# Altium PCB EK2_SMPS.PcbDoc
Units mm, origin at the board's own origin, x right, y up, seen from the top; angles counter-clockwise.
Board outline 100 x 100 mm, 2 copper layers (Top Layer, Bottom Layer); 55 components, 21 nets, 150 pads, 77 vias.
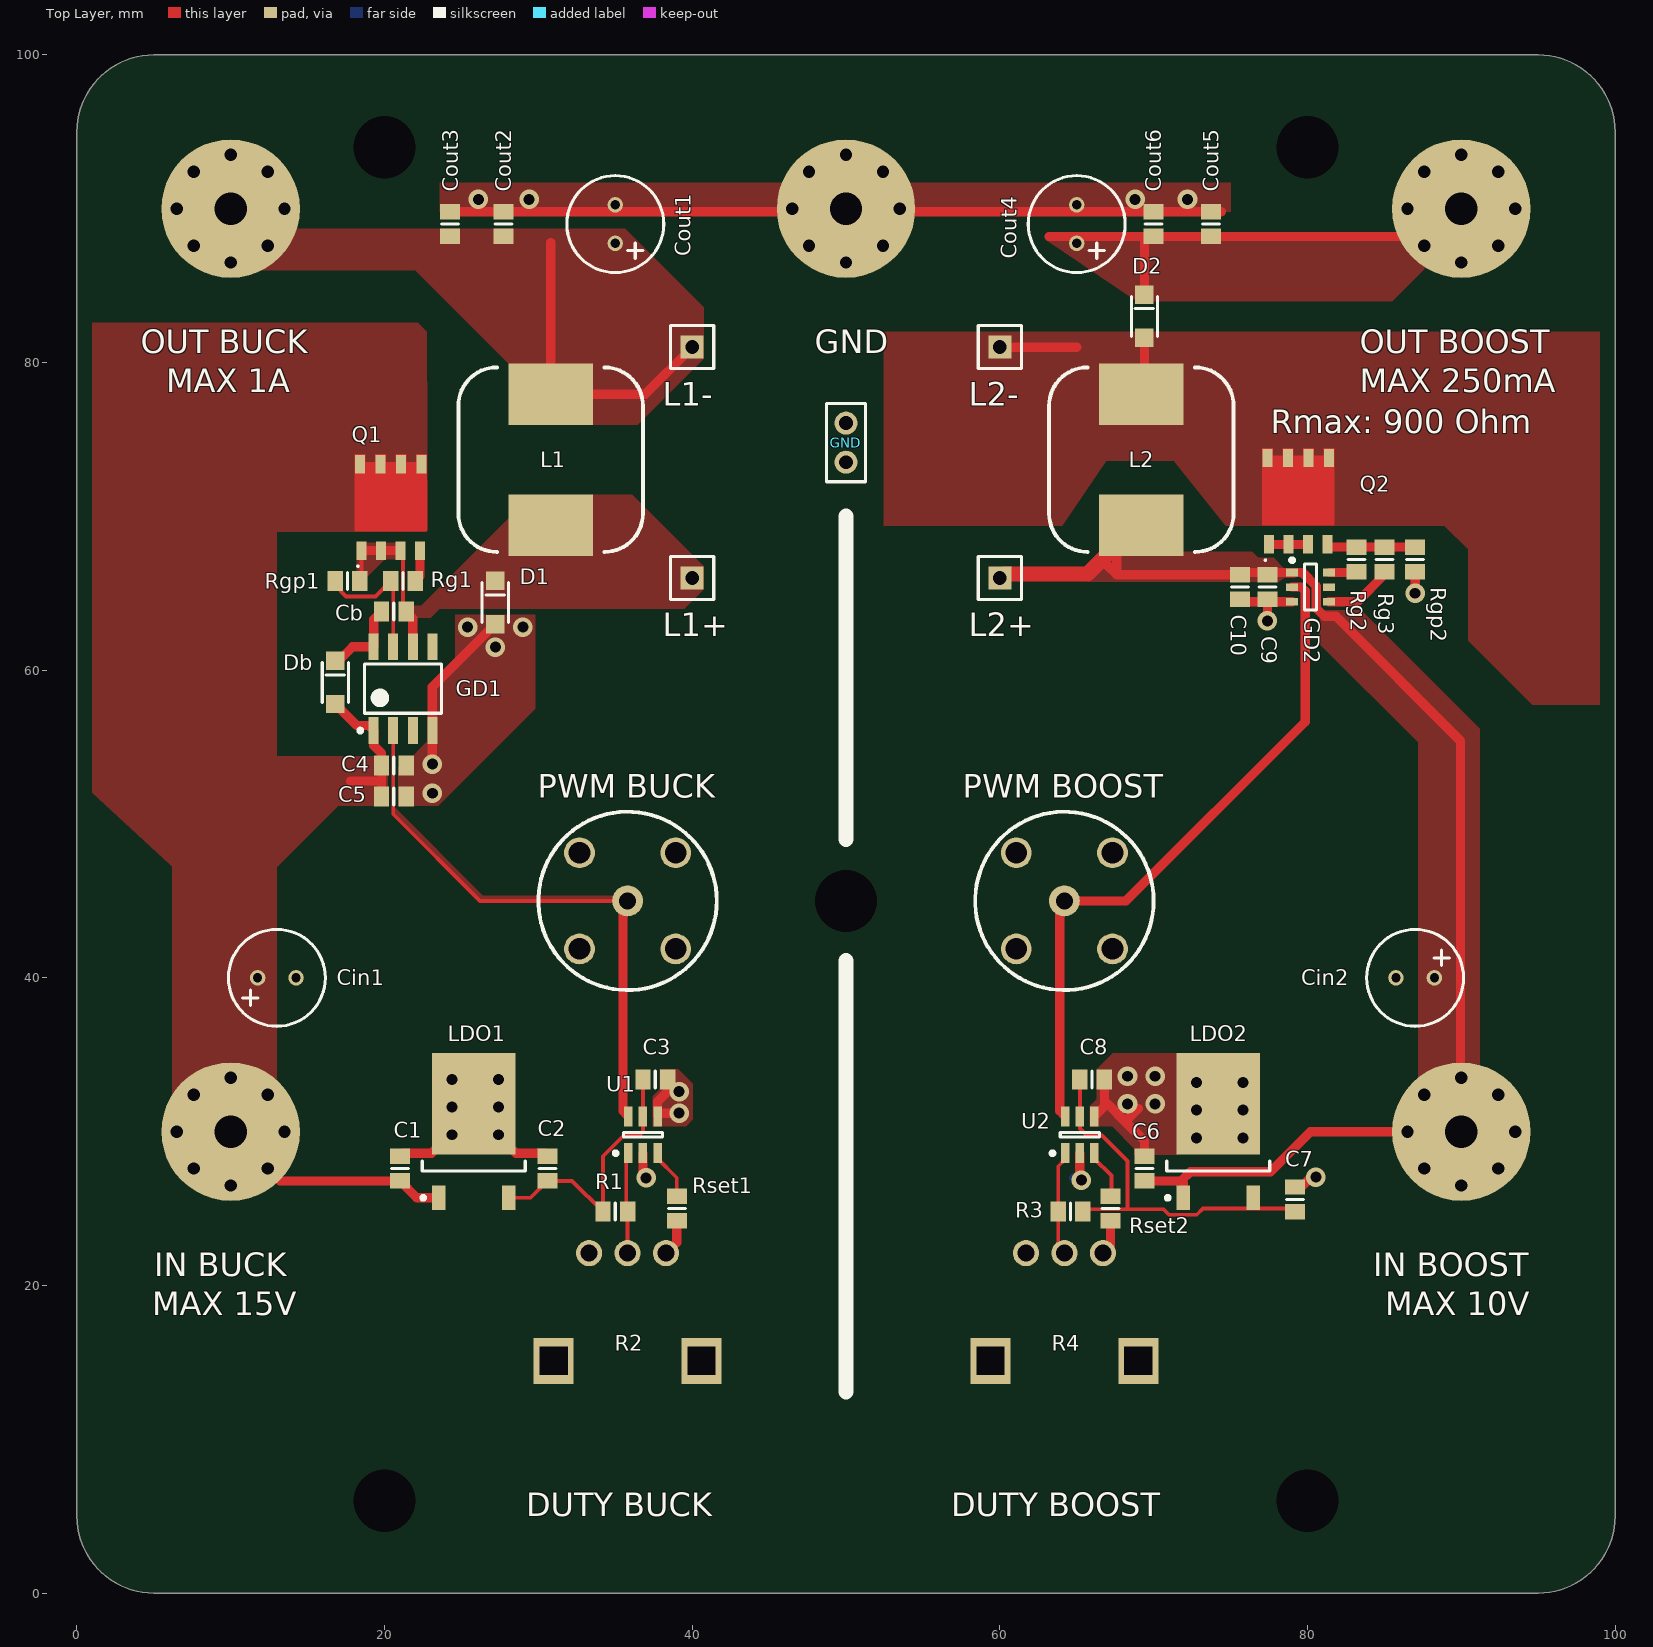
[diagram p0: Top Layer view]
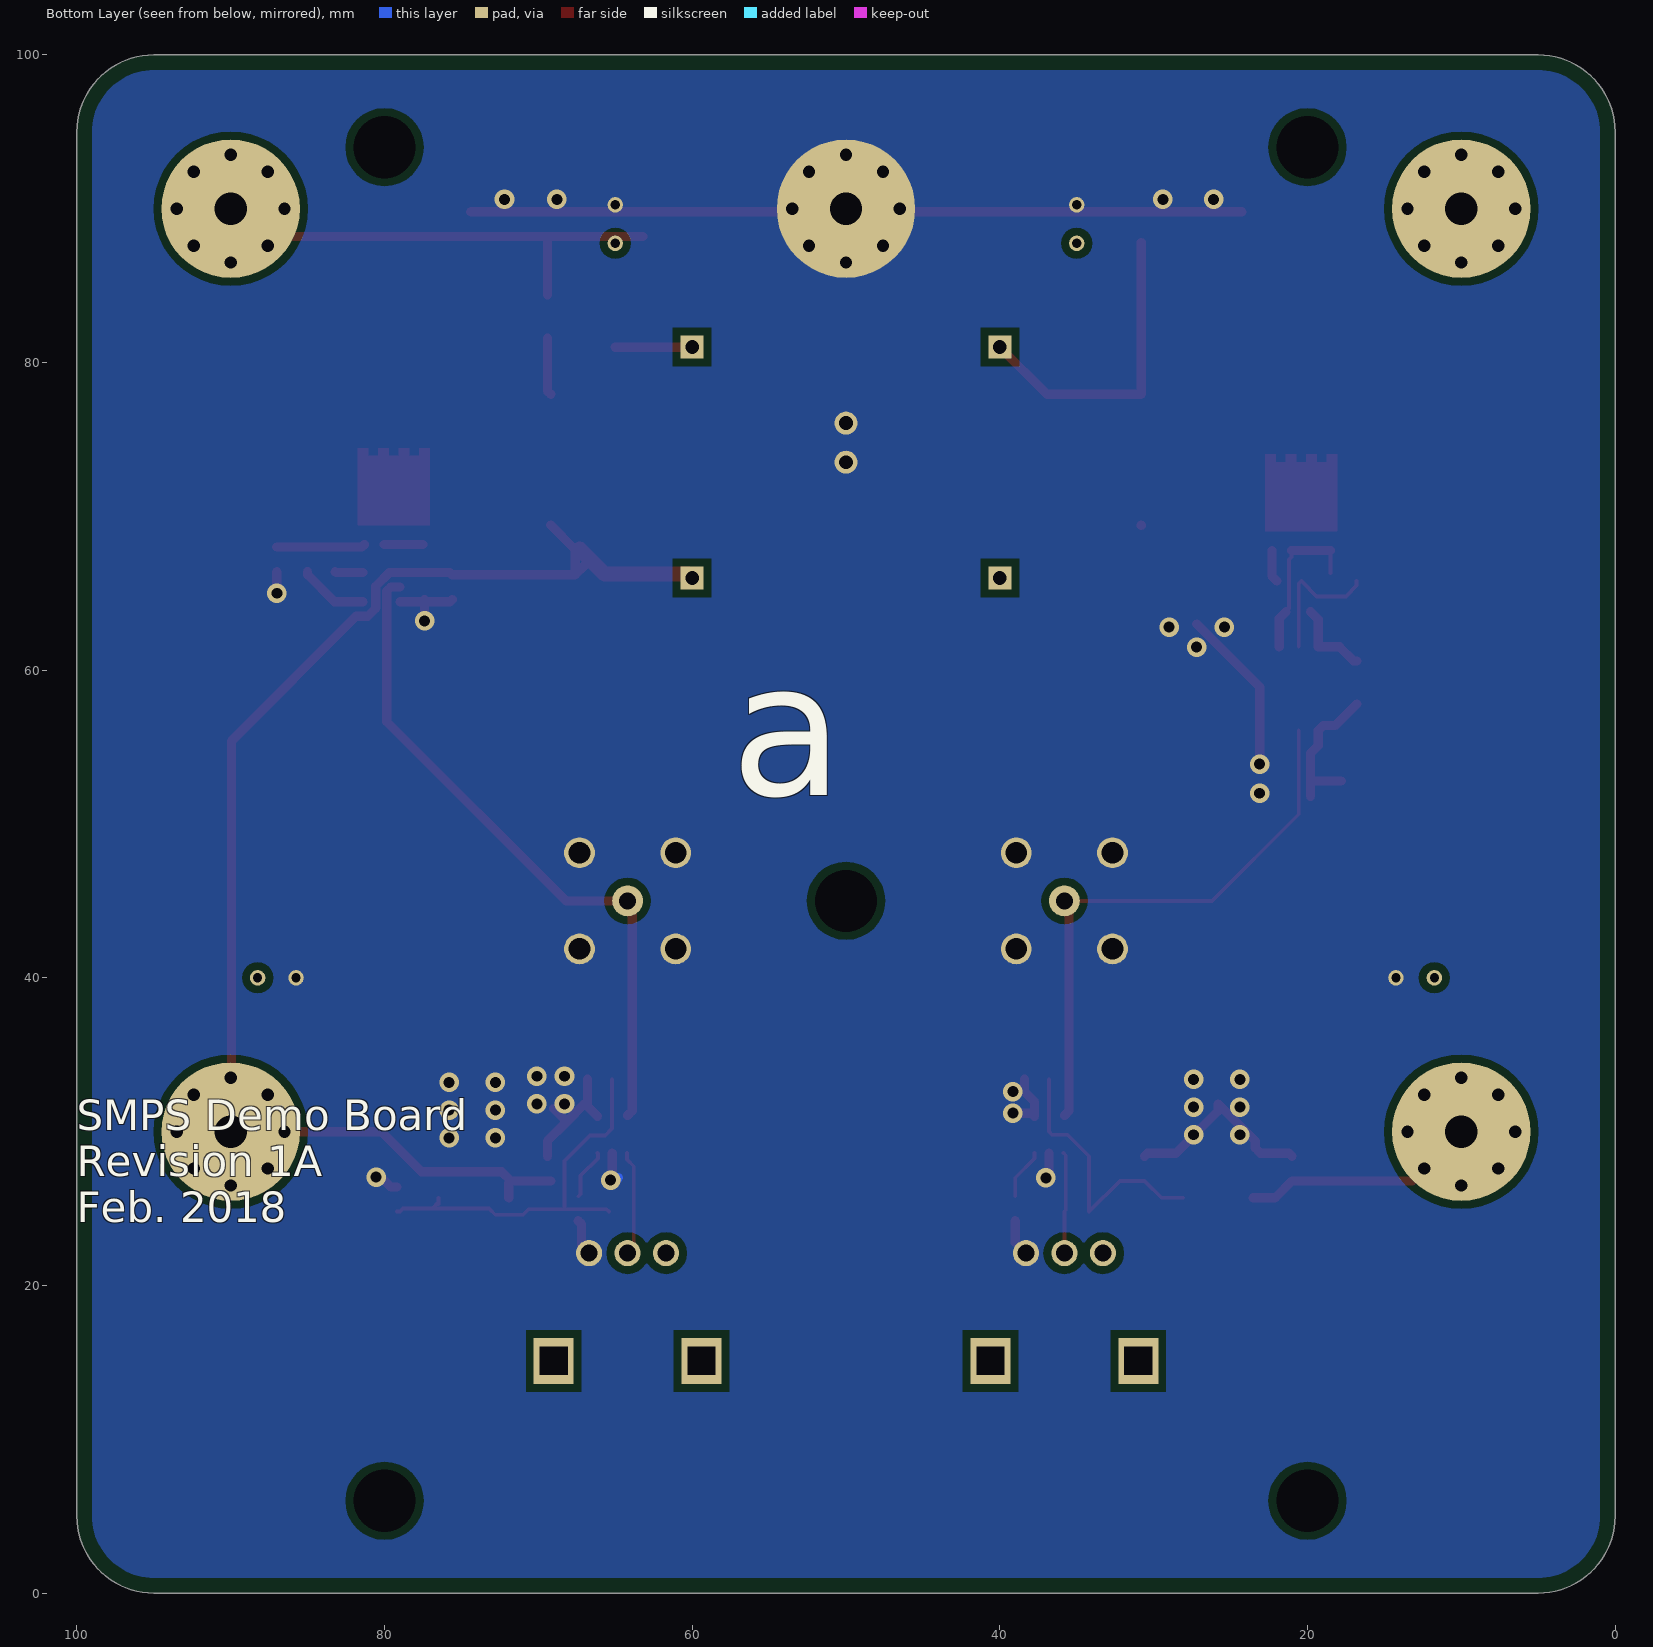
[diagram p1: Bottom Layer view, seen from below]

## Layer stack, top to bottom
Top Solder: solder mask 0.0102, Solder Resist, Dk 3.5
Top Layer: signal copper 0.0356
Dielectric 1: dielectric 0.32, FR-4, Dk 4.8
Bottom Layer: signal copper 0.0356
Bottom Solder: solder mask 0.0102, Solder Resist, Dk 3.5

## Board outline
5,0 cw(c5,5) 0,5 0,95 cw(c5,95) 5,100 95,100 cw(c95,95) 100,95 100,5 cw(c95,5) 95,0

## Design rules (kind name [scope] priority, off if disabled: settings)
Clearance Clearance_GND_plane [InNet('GND') And OnLayer('Bottom Layer')] p1: gap=0.5 ignorepadtopadclearanceinfootprint=TRUE
Clearance Clearance_1 [All] p2: gap=0.125 ignorepadtopadclearanceinfootprint=TRUE
HoleSize [All] p1: absolutevalues=TRUE maxlimit=5 minlimit=0.025 maxpercent=80.000 minpercent=20.000
HoleToHoleClearance HoleToHoleClearance_1 [InNet('GND') OR InNet('NetC1_1') OR InNet('NetC6_2') OR InNet('NetCout1_2') OR InNet('NetCout5_2')] p1: gap=0 allowstackedmicrovias=TRUE
HoleToHoleClearance [All] p2: gap=0.125 allowstackedmicrovias=TRUE
MinimumSolderMaskSliver [All] p1: minsoldermaskwidth=0.125
NetAntennae [All] p1 off: netantennaetolerance=0
PolygonConnect [All] p1: connectstyle=Direct reliefconductorwidth=0.254 reliefentries=4 polygonreliefangle="90 Angle" airgapwidth=0.254
RoutingVias [All] p1: holewidth=0.711 width=1.27 viastyle="Through Hole" minholewidth=0.3 minwidth=0.4 maxholewidth=5 maxwidth=5
SMDNeckDown [All] p1 off: percent=50.000
SilkToSilkClearance [All] p1: silktosilkclearance=0.125
SilkToSolderMaskClearance [IsPad] p1: minsilkscreentomaskgap=0.125 clearancetoexposedcopper=TRUE
SolderMaskExpansion [All] p1: expansion=0.102
UnRoutedNet [All] p1 off:
Width [InNet('NetC1_1') OR InNet('NetC6_2') OR InNet('GND') OR InNet('NetD2_1') OR InNet('NetCout5_2') OR InNet('NetGD2_6') OR InNet('NetQ2_4') OR InNet('NetGD2_2') OR InNet('NetCb_1') OR  InNet('NetQ1_4') OR InNet('NetQ2_4')OR InNet('NetCout1_2') OR InNet('NetCb_2')  OR InNet('NetGD2_4')] p1: maxlimit=1 minlimit=0.254 preferedwidth=0.6
Width Width_1 [All] p2: maxlimit=1 minlimit=0.254 preferedwidth=0.254
23 further rules are at their usual default settings.

## Components (designator, comment, footprint, x,y, rotation, side; value= is the part's Value field where it differs from the comment)
C1 "Cap" 6-0805_L 21,27.6 r90 top value=100nF
C2 "Cap" 6-0805_L 30.6,27.6 r270 top value=100nF
C3 "Cap" 6-0805_L 37.6,33.4 r180 top value=100nF
C4 "Cap" 6-0805_L 20.6,53.8 r180 top value=100nF
C5 "Cap" 6-0805_L 20.6,51.8 r180 top value=1uF
C6 "Cap" 6-0805_L 69.4,27.6 r270 top value=100nF
C7 "Cap" 6-0805_L 79.2,25.6 r270 top value=100nF
C8 "Cap" 6-0805_L 66,33.4 r0 top value=100nF
C9 "Cap" 6-0805_L 77.4,65.4 r270 top value=100nF
C10 "Cap" 6-0805_L 75.6,65.4 r270 top value=1uF
Cb "Cap" 6-0805_L 20.6,63.8 r0 top value=100nF
Cin1 "56uF" PANASONIC56 13,40 r180 top
Cin2 "56uF" PANASONIC56 87,40 r0 top
Cout1 "56uF" PANASONIC56 35,89 r270 top
Cout2 "Cap" 6-0805_L 27.733,89 r270 top value=1uF
Cout3 "Cap" 6-0805_L 24.266,89 r270 top value=100nF
Cout4 "56uF" PANASONIC56 65,89 r270 top
Cout5 "Cap" 6-0805_L 73.733,89 r270 top value=1uF
Cout6 "Cap" 6-0805_L 70,89 r270 top value=100nF
D1 "PMEG6020" PMEG6020 27.2,64.4 r270 top
D2 "PMEG6020" PMEG6020 69.4,83 r270 top
Db "PMEG6020" PMEG6020 16.8,59.2 r270 top
GD1 "FAN7371" FAN7371 21.2,58.8 r90 top
GD2 "ZXGD3005E6" "ZXGD3005E6 (DIODES INC)" 80.2,65.4 r0 top
GND "Banana Jack Black" "CT2912-0 (BLACK)" 50,90 r0 top locked
GND "Header 2" PIN2 50,74.79 r270 top
"IN BOOST" "MAX 10V" "CT2912-2 (RED)" 90,30 r0 top locked
"IN BUCK" "MAX 15V" "CT2912-2 (RED)" 10,30 r0 top locked
L1 "Coilcraft MSS1246-154KL" "COILCRAFT MSS1246-154KL" 30.8,73.685 r180 top value=150uH
L1+ "Plug" PIN1 40,66 r0 top
L1- "Plug" PIN1 40,81 r0 top
L2 "Coilcraft MSS1246-154KL" "COILCRAFT MSS1246-154KL" 69.2,73.685 r180 top value=150uH
L2+ "Plug" PIN1 60,66 r0 top
L2- "Plug" PIN1 60,81 r0 top
LDO1 "LP2950CDT-5.0" TD03B_L 25.8,30 r90 top
LDO2 "LP2950CDT-5.0" TD03B_L 74.2,30 r90 top
"OUT BOOST" "MAX 250mA" "CT2912-2 (RED)" 90,90 r0 top locked
"OUT BUCK" "MAX 1A" "CT2912-2 (RED)" 10,90 r0 top locked
"PWM BOOST" "BNC" BNC 64.2,45 r0 top locked
"PWM BUCK" "BNC" BNC 35.8,45 r0 top locked
Q1 "BSC900N20NS3 G" INF-PG-TDSON-8-1_V 20.4,70.6 r0 top
Q2 "BSC900N20NS3 G" INF-PG-TDSON-8-1_V 79.4,71 r0 top
R1 "Res1" 6-0805_L 35,24.8 r0 top value=100K
R2 "DUTY BUCK" "BOURNS PTV09A-4020" 35.8,15 r180 top locked value=20K
R3 "Res1" 6-0805_L 64.6,24.8 r0 top value=150K
R4 "DUTY BOOST" "BOURNS PTV09A-4020" 64.2,15 r180 top locked value=20K
Rg1 "Res1" 6-0805_L 21.2,65.8 r0 top value=5R
Rg2 "Res1" 6-0805_L 83.2,67.2 r90 top value=5R
Rg3 "Res1" 6-0805_L 85,67.2 r90 top value=5R
Rgp1 "Res1" 6-0805_L 17.6,65.8 r180 top value=100k
Rgp2 "Res1" 6-0805_L 87,67.2 r90 top value=100k
Rset1 "Res1" 6-0805_L 39,25 r90 top value=250K
Rset2 "Res1" 6-0805_L 67.2,25 r90 top value=250K
U1 "LTC6992" LTC6992 36.8,29.8 r90 top
U2 "LTC6992" LTC6992 65.2,29.8 r90 top

## Footprints (in the part's own frame and the unit in brackets; to place one, negate y for a bottom-side part, rotate by r counter-clockwise, add the part's x,y. Pads: shape width x height; smd on the part's side, far side on the other; paste and mask are expansions set on the pad)
6-0805_L [mm] "Chip Resistor, Body 2.0x1.2mm, IPC High Density"
  rect 1x1.3 smd: 1(-0.8,0) 2(0.8,0)
  silkscreen extent 0,-0.55 0,0.55, body extent -1.07,-0.7 1.07,0.7, height 0.7
BNC [mm] "BNC RS Pro female connector"
  round 2 hole 1.1: 1(0,0)
  round 2 hole 1.4: 2(-3.125,-3.125) 2(-3.125,3.125) 2(3.125,-3.125) 2(3.125,3.125)
  silkscreen extent -5.8,-5.8 5.8,5.8, body extent -4.51,-3.77 4.51,3.77, height 11.5
"BOURNS PTV09A-4020" [mm] "Potentiometer"
  round 1.7 hole 1.1: 1(0,-7.1) 2(-2.5,-7.1) 3(2.5,-7.1)
  rect 2.6x3 hole 1.8 square: NC(-4.8,-0.1) NC(4.8,-0.1)
  body extent -5.7,-7.15 5.7,5.5, height 15
"COILCRAFT MSS1246-154KL" [mm] "150uH low DCR inductor"
  rect 5.5x4 smd: 1(0,4.25) 2(0,-4.25)
  silkscreen extent -6,-6 6,6, body extent -6.1,-6.1 6.1,6.1, height 4.6
"CT2912-0 (BLACK)" [mm] "Banana Jack - Cal Test CT2912-0"
  round 9 hole 2.1: 1(0,0)
  body extent -7.1,-7.1 7.1,7.1, height 24
"CT2912-2 (RED)" [mm] "Banana Jack - Cal Test CT2912-2"
  round 9 hole 2.1: 1(0,0)
  body extent -7.1,-7.1 7.1,7.1, height 24
FAN7371 [mm] "SOP, 8-Leads, Body 4.90x3.90mm, Pitch 1.27mm, IPC Medium Density"
  rect 1.75x0.65 smd: 1(-2.725,1.905) 2(-2.725,0.635) 3(-2.725,-0.635) 4(-2.725,-1.905) 5(2.725,-1.905) 6(2.725,-0.635) 7(2.725,0.635) 8(2.725,1.905)
  silkscreen extent -2.85,-2.5 1.6,2.9, body extent -3,-2.5 3,2.5, height 1.75
INF-PG-TDSON-8-1_V [mm] "TDSON, 8-Leads, Body 6.15x5.15mm, Pitch 1.27mm"
  rect 0.65x1.2 smd: 1(-1.905,-2.825) 2(-0.635,-2.825) 3(0.635,-2.825) 4(1.905,-2.825) 5(2.007,2.794) 6(0.66,2.794) 7(-0.66,2.794) 8(-2.007,2.794)
  Top Layer region: 0.315,2.925 1.015,2.925 1.015,3.425 0.315,3.425
  Top Layer region: -1.015,2.925 -0.315,2.925 -0.315,3.425 -1.015,3.425
  Top Layer region: 1.65,2.925 2.35,2.925 2.35,3.425 1.65,3.425
  Top Layer region: -2.35,2.925 -1.65,2.925 -1.65,3.425 -2.35,3.425
  Top Layer region: -2.35,2.925 -2.35,-1.575 2.35,-1.575 2.35,2.925
  silkscreen extent -2.23,-3.94 -2.03,-3.74, body extent -2.58,-3.08 2.58,3.08, height 1
LTC6992 [mm] "TSOT23-N medium density"
  rect 1.3x0.55 smd: 1(-1.2,0.95) 2(-1.2,0) 3(-1.2,-0.95) 4(1.2,-0.95) 5(1.2,0) 6(1.2,0.95)
  silkscreen extent -1.32,-1.27 0.15,1.9, body extent -0.87,-1.45 0.87,1.45, height 1
PANASONIC56 [mm] "Panasonic EEU-FM1H560"
  round 1 hole 0.6: 1(1.25,0) 2(-1.25,0)
  silkscreen extent -3.15,-3.15 3.15,3.15, body extent -3.16,-3.15 3.15,3.15, height 11.01
PIN1 [mm] "Connector; Plug"
  rect 1.5x1.5 hole 0.9: 1(0,0)
  silkscreen extent -1.4,-1.4 1.4,1.4, body extent -1.27,-1.24 1.27,1.25, height 8.54
PIN2 [mm] "Connector; Header; 2 Position"
  round 1.5 hole 0.9: 1(-1.27,0) 2(1.27,0)
  silkscreen extent -2.54,-1.27 2.54,1.27, body extent -2.54,-1.24 2.54,1.25, height 8.54
PMEG6020 [mm]
  rect 1.2x1.2 smd: 1(1.4,0) 2(-1.4,0)
  silkscreen extent -1.3,-0.85 1.3,0.85, body extent -2,-0.95 2,0.95, height 1.1
TD03B_L [mm] "D-PAK, 4-Leads, Body 6.1x6.6mm, Pitch 2.29mm, Lead Span 9.7mm, IPC High Density"
  rect 1.6x0.9 smd: 1(-4.3,2.28) 3(-4.3,-2.28)
  rect 6.6x5.45 smd: 4(1.8,0)
  silkscreen extent -4.42,-3.35 -1.9,3.4, body extent -2.55,-3.35 3.65,3.35, height 2.38
"ZXGD3005E6 (DIODES INC)" [mm]
  rect 0.8x0.5 smd: 1(-1.2,0.95) 2(-1.2,0) 3(-1.2,-0.95) 4(1.2,-0.95) 5(1.2,0) 6(1.2,0.95)
  silkscreen extent -1.32,-1.5 0.4,1.87, body extent -1.4,-1.5 1.4,1.5, height 1.1

## Part data
C1 C2 C3 C4 C5 C6 C7 C8 C9 C10 Cb Cout2 Cout3 Cout5 Cout6: "Capacitor"
Cin1 Cin2 Cout1 Cout4: library part "Cap Pol1", "Polarized Capacitor (Radial)"
D1 D2 Db: library part Diode, "Default Diode"
GD2: library part "ZXGD3005E6 (Diodes Inc)"
GND: library part Socket, "Socket"
GND: "Header, 2-Pin", LatestRevisionDate=17-Jul-2002, LatestRevisionNote="Re-released for DXP Platform.", Publisher="Altium Limited"
"IN BOOST" "IN BUCK" "OUT BOOST" "OUT BUCK": library part Socket, "Banana Jack Red"
L1 L2: library part Inductor, "Inductor"
LDO1 LDO2: library part CMP-0062-00257-2, "Series of Adjustable Micropower Voltage Regulators, 3-pin TO-252", Manufacturer="National Semiconductor", PackageTopMarking=NSUZXYTT*LP2950*CDT-5.0, PowerWise=N, Code_JEDEC=TO-252-AA, ComponentLink1Description="LP2950 Datasheet", ComponentLink1URL=http://www.national.com/ds/LP/LP2950.pdf, ComponentLink2Description="LP2950 Web Page", ComponentLink2URL=http://www.national.com/pf/LP/LP2950.html, ComponentLink3Description="TD03B Package Page", ComponentLink3URL=http://www.national.com/packaging/folders/td03b.html, CompType="LDO IC", DatasheetVersion=May-2005, PackageDescription="TO252, Molded, Jedec, 6.8 x 6.10 x 2.30mm Body, 3 Lead, 2.28mm Pitch, Surface Mount", PackageReference=TD03B, PackageVersion="revD, Feb-2009", PinCount=3, RevisionNote="Component URLs added", RoHS=N
Q1 Q2: library part CMP-1091-00024-1, "N-Channel OptiMOS 3 Power-Transistor, 200 V VDS, 15.2 A ID, -55 to 150 degC, PG-TDSON-8-1, Reel, Green", Manufacturer=Infineon, ComponentLink1Description="Manufacturer URL", ComponentLink1URL=http://www.infineon.com/, ComponentLink2Description=Datasheet, ComponentLink2URL=http://www.infineon.com/dgdl/BSC900N20NS3+Rev2.2.pdf?folderId=db3a304325305e6d012596c6ca7b290a&fileId=db3a30432ad629a6012b144f6b0619db, ComponentLink3Description="Package Specification", ComponentLink3URL=http://www.infineon.com/cms/packages/SMD_-_Surface_Mounted_Devices/P-PG-TDSON/P-PG-TDSON-08-01x_2x_3.html?__locale=en, DatasheetVersion="Rev. 2.2", Green=TRUE, Halogen-free=TRUE, ID (max)="15.2 A", IDpuls (max)="61 A", Mounting Technology="Surface Mount", PackageDescription="8-Pin Plastic (Green) Thin Dual Small Outline Non-Leaded Package, 5.15 x 5.9 mm Body, 1.27 mm Pitch", PackageReference=PG-TDSON-8-1, Packing=Reel, PartNumber="BSC900N20NS3 G", Polarity=N, Ptot (max)="62.5 W", QG="9 nC", RDS (on) (max)="90 mOhm", Rth="2 K/W", RthJA (max)="50 K/W", RthJC (max)="2 K/W", VDS (max)="200 V", VGS(th) (max)="4 V", VGS(th) (min)="2 V"
R1 R3 Rg1 Rg2 Rg3 Rgp1 Rgp2 Rset1 Rset2: "Resistor"
R2 R4: library part "Res Adj1", "Variable Resistor"
U1 U2: "LTC6992 PWM generator"
L1+ L1- L2+ L2-: LatestRevisionDate=17-Jul-2002, LatestRevisionNote="Re-released for DXP Platform.", Publisher="Altium Limited"

## Free pads (board coordinates)
  round 0 hole 4.05 paste+0: 2(20,94) 3(80,94) 4(20,6) 5(80,6) 6(50,45)

## Via types
v1: diameter 1.2, hole 0.8, Top Layer to Bottom Layer, tented bottom, 40 vias
v2: diameter 1.27, hole 0.711, Top Layer to Bottom Layer, tented both sides, 32 vias
v3: diameter 3.2, hole 2.1, Top Layer to Bottom Layer, 5 vias

## Nets (pads, with @x,y where several pads share a name; then routed paths per layer and width w, separated by ;. In a path a pad name is that pad's centre, name@x,y a point inside that pad or via, vN(x,y) a via of type N, cw(c..) or ccw(c..) an arc to the next point about the centre after c; other vN are vias at no path point)
5V-BOOST: C7.2 C8.1 LDO2.3 R3.2 U2.5 | length 25.6
  Top Layer w0.254: C8.1 65.2,30.2 65.65,29.75 66.65,29.75 68.3,28.1 68.3,24.952 ; R3.2 65.552,24.952 68.3,24.952 ; LDO2.3@76.48,25.28 LDO2.3@76.48,25.42 ; LDO2.3 LDO2.3@76.48,25.42 ; C7.2 79,24.8 78.8,25 LDO2.3@76.9,25 ; 68.3,24.952 70.648,24.952 71,24.6 72.8,24.6 73.2,25 LDO2.3@76.9,25 ; LDO2.3@76.48,25.42 LDO2.3@76.9,25
5V-BUCK: C2.2 C3.2 LDO1.3 R1.1 U1.5 | length 17.7
  Top Layer w0.254: LDO1.3 29.5,25.7 C2.2 32.2,26.8 R1.1 34.2,28.4 35.6,29.8 36.6,29.8 36.8,30 C3.2
GND: "PWM BOOST.2" "PWM BUCK.2" C1.2 C2.1 C3.1 C4.1 C5.1 C6.1 C7.1 C8.2 C9.2 C10.2 Cin1.2 Cin2.2 Cout1.2 Cout2.1 Cout3.1 Cout4.2 Cout5.1 Cout6.1 D1.1 GD1.4 GD2.3 GND.1 GND.2 LDO1.4 LDO2.4 Q2.1 Q2.2 Q2.3 R2.2 R4.2 Rgp2.1 Rset1.1 Rset2.1 U1.2 U1.4 U2.2 U2.4 | length 99.2
  Top Layer w0.6: C1.2 21.2,28.6 23.05,28.6 23.4,28.95 23.4,29.4 LDO1.4 25.8,31.35 28.55,28.6 30.4,28.6 C2.1 ; v2@23,52 v2@23.25,52 ; v2(23.105,53.895) 23.105,58.905 D1.1 ; Cout3.1 Cout2.1 46.3,89.8 v1(46.5,90) ; v2@36.8,27 v2(37,27) ; v2@36.8,27.4 U1.2 ; U1.4 U1.4@37.75,31.4 ; R2.2 39,22.8 Rset1.1 ; C3.1 38.4,32.6 37.75,31.95 U1.4@37.75,31.4 ; v2(39.15,31.2) 37.95,31.2 U1.4@37.75,31.4 ; v1(53.5,90) 53.7,89.8 74.4,89.8 ; v2@65.1,26.9 65.15,26.85 v2(65.3,26.85) 65.3,27 65.2,27.1 U2.2 ; U2.4 66.975,31.825 68.2,30.6 ; R4.2 67.2,22.6 67.2,24 Rset2.1@67.4,24.2 ; 66.8,31.65 C8.2 ; 69,31.5 68.2,30.7 68.2,30.6 ; C6.1 69.4,29.4 68.2,30.6 ; C10.2 75.75,64.45 C9.2@77.4,64.45 ; v2(77.4,63.2) C9.2@77.4,64.45 ; C9.2 C9.2@77.4,64.45 ; Q2.1 Q2.2 Q2.3 ; GD2.3 C9.2@77.4,64.45 ; C7.1 79.6,26.4 80.25,27.05 v2(80.55,27.05) ; v2(87,65) Rgp2.1
  Bottom Layer w0.6: v2@64.8,27 64.95,26.85 v2(65.3,26.85)
  other v1: 50,86.5 47.6,87.6 52.4,87.6 47.6,92.4 52.4,92.4 50,93.5
  other v2: 72.8,29.6 75.8,29.6 24.4,29.8 27.4,29.8 72.8,31.4 75.8,31.4 24.4,31.6 27.4,31.6 68.3,31.8 70.1,31.8 39.15,32.6 72.8,33.2 75.8,33.2 24.4,33.4 27.4,33.4 68.3,33.6 70.1,33.6 23.105,52 27.2,61.5 25.4,62.8 29,62.8 26.1,90.6 29.4,90.6 68.8,90.6 72.2,90.6
  other v3: 50,90
NetC1_1: "IN BUCK.1" C1.1 C4.2 C5.2 Cin1.1 Db.1 GD1.1 LDO1.1 Q1.5 Q1.6 Q1.7 Q1.8 | length 25
  Top Layer w0.6: v3(10,30) 13.2,26.8 C1.1 22.1,25.7 LDO1.1 ; Db.1 18.2,56.4 18.97,56.4 19.295,56.075 19.295,55.105 19.8,54.6 C4.2 19.8,52.8 ; 17.8,52.8 19.8,52.8 ; C5.2 19.8,52.8
  other v1: 10,26.5 7.6,27.6 12.4,27.6 6.5,30 13.5,30 7.6,32.4 12.4,32.4 10,33.5
NetC6_2: "IN BOOST.1" C6.2 C9.1 C10.1 Cin2.1 GD2.1 L2+.1 L2.1 LDO2.1 | length 86.4
  Top Layer w0.6: 67,66.8 67.6,66.2 ; 67.15,66.65 67.6,66.2 ; C6.2@69.2,26.8 C6.2 71.8,26.8 ; L2.1 67.6,67.835 67.6,66.2 ; LDO2.1 71.92,26.68 71.8,26.8 ; v3(90,30) 80.2,30 77.6,27.4 72.4,27.4 71.8,26.8 ; v1(90,33.5) 89.95,33.55 89.95,55.4 81.85,63.5 81.099,63.5 80.575,64.024 80.575,65.45 79.675,66.35 75.75,66.35 C10.1 67.6,66.2
  Top Layer w1: L2+.1 60.25,66.25 65.7,66.25 L2.1@67.3,67.85
  other v1: 90,26.5 87.6,27.6 92.4,27.6 86.5,30 93.5,30 87.6,32.4 92.4,32.4
NetCb_1: Cb.1 Db.2 GD1.8 | length 5.4
  Top Layer w0.6: Db.2 17,60.6 17.925,61.525 19.295,61.525 19.295,63.295 Cb.1
NetCb_2: Cb.2 D1.2 GD1.6 L1+.1 L1.1 Q1.1 Q1.2 Q1.3 Rgp1.1 | length 10.6
  Top Layer w0.254: Rgp1.1@18.495,66.305 Q1.1 ; Q1.3 21.035,67.365 21.2,67.2 21.2,64 Cb.2
  Top Layer w0.6: Q1.1 Q1.2 Q1.3 ; Cb.2 21.835,63.365 GD1.6@21.835,61.525 ; L1.1@30.8,69.4 L1.1
NetCout1_1: "OUT BUCK.1" Cout1.1 Cout2.2 Cout3.2 L1-.1 L1.2 | length 22.9
  Top Layer w0.6: v3(10,90) 11.8,88.2 ; 30.8,87.8 L1.2 36.935,77.935 L1-.1
  other v1: 10,86.5 7.6,87.6 12.4,87.6 6.5,90 13.5,90 7.6,92.4 12.4,92.4 10,93.5
NetCout4_1: "OUT BOOST.1" Cout4.1 Cout5.2 Cout6.2 D2.2 | length 31.3
  Top Layer w0.6: 63.2,88.2 Cout6.2@69.4,88.2 ; D2.2 Cout6.2@69.4,88.2 ; v3(90,90) 88.2,88.2 Cout5.2 Cout6.2 Cout6.2@69.4,88.2
  other v1: 90,86.5 87.6,87.6 92.4,87.6 86.5,90 93.5,90 87.6,92.4 92.4,92.4 90,93.5
NetD2_1: D2.1 L2-.1 L2.2 Q2.5 Q2.6 Q2.7 Q2.8 | length 8.7
  Top Layer w0.6: L2-.1 65,81 ; L2.2 69.4,78.135 D2.1
NetGD1_2: "PWM BUCK.1" GD1.2 U1.6 | length 37.2
  Top Layer w0.254: GD1.2@20.565,56.075 20.565,50.635 26.2,45 35.8,45
  Top Layer w0.6: U1.6@35.8,31.05 35.5,31.35 35.5,44.7 35.8,45
NetGD1_7: GD1.7 Rg1.1 Rgp1.2 | length 8.9
  Top Layer w0.254: Rgp1.2 16.8,65.5 17.5,64.8 19.4,64.8 Rg1.1 20.565,65.635 GD1.7@20.565,61.525
NetGD2_2: "PWM BOOST.1" GD2.2 U2.6 | length 44.1
  Top Layer w0.6: U2.6@64.2,31.05 63.9,31.35 63.9,44.7 64.2,45 68.2,45 79.85,56.65 79.85,65.15 79.6,65.4 GD2.2
NetGD2_4: GD2.4 Rg3.1 | length 4.5
  Top Layer w0.6: GD2.4 83.25,64.45 85,66.2 Rg3.1
NetGD2_6: GD2.6 Rg2.1 | length 1.8
  Top Layer w0.6: GD2.6 83.15,66.35 Rg2.1
NetQ1_4: Q1.4 Rg1.2 | length 2.1
  Top Layer w0.6: Rg1.2 22.305,66.105 Q1.4
NetQ2_4: Q2.4 Rg2.2 Rg3.2 Rgp2.2 | length 5.8
  Top Layer w0.6: Q2.4 81.48,68 Rg2.2 Rg3.2 Rgp2.2
NetR1_2: R1.2 R2.1 U1.1 | length 6.6
  Top Layer w0.254: R2.1 R1.2 35.713,24.887 35.713,28.463 U1.1
NetR3_1: R3.1 R4.1 U2.1 | length 6.9
  Top Layer w0.254: R4.1 63.8,22.5 R3.1 63.8,27.75 64.25,28.2 U2.1
NetRset1_2: Rset1.2 U1.3 | length 3.3
  Top Layer w0.254: U1.3 37.75,28.25 39,27 Rset1.2
NetRset2_2: Rset2.2 U2.3 | length 3.3
  Top Layer w0.254: U2.3 66.134,28.584 66.134,28.266 67.25,27.15 67.25,25.95 Rset2.2@67.4,25.8
pads on no net: GD1.3 GD1.5 GD2.5 R2.3 R2.NC R4.3 R4.NC

## Polygon pours and split planes (outlines as drawn)
NetCout1_1 on Top Layer "NETCOUT1_1_L01_P050" (solid, remove dead copper, pour order 50): 35.65,88.7 40.75,83.6 40.75,80.25 36.45,75.95 33.55,75.95 33.55,88.7
NetCb_2 on Top Layer "NETCB_2_L01_P048" (solid, remove dead copper, pour order 48): 33.5,64 39.5,64 40.75,65.25 40.75,66.75 36.1,71.4 33.5,71.4
NetC1_1 on Top Layer "NETC1_1_L01_P012" (solid, pour order 12): 6.2,70.5 9.4,70.5 13,70.5 13,32.7 11.9,31.6 11.5,32 6.2,32
NetD2_1 on Top Layer "SN_BOOST" (solid, pour order 46): 88.9,69.4 90.45,67.85 90.45,61.9 94.6,57.75 99,57.75 99,82 67,82 52.45,82 52.45,69.4 64.068,69.4 66.932,73.6 71.3,73.6 74.7,69.4
GND on Top Layer "GND_L01_P042" (solid, remove dead copper, pour order 42): 37.45,30.35 37.45,32.3 37.9,32.75 37.9,34.05 39.1,34.05 40.05,33.1 40.05,30.8 39.6,30.35
GND on Top Layer "GND_L01_P040" (solid, remove dead copper, pour order 40): 65.85,30.35 67.3,30.35 68.75,28.9 68.75,28.5 71.6,28.5 71.6,35.1 67.35,35.1 66.3,34.05 66.3,32.1 65.85,31.65
GND on Top Layer "GND_L01_P038" (solid, remove dead copper, pour order 38): 29.8,60.2 29.8,57.5 24.8,52.5 23.105,54.195 23.105,59.005 24.3,60.2
GND on Top Layer "GND_L01_P036" (solid, remove dead copper, pour order 36): 29.8,63.6 29.8,60.2 28,58.4 25.7,58.4 24.6,59.5 24.6,63.6
NetCb_2 on Top Layer "NETCB_2_L01_P010" (solid, pour order 10): 18.8,66 20,67.2 20.8,67.2 20.8,68.3 18.2,68.3 18.2,66
NetGD1_2 on Top Layer "NETGD1_2_L01_P028" (solid, pour order 28): 35.05,45.05 35.05,45.35 26.4,45.35 20.7,51.05 20.565,51.05 20.565,50.635 26.2,45
NetC1_1 on Top Layer "NETC1_1_L01_P008" (solid, pour order 8): 20.2,54.4 20.2,51.2 17,51.2 12.6,46.8 12.6,54.4
NetCb_2 on Top Layer "SN_BUCk" (solid, pour order 2): 22.4,64.2 29.2,71 32.6,71 33.5,70.1 33.5,64 23.6,64 23,63.4 21.2,63.4 21.2,64.2
NetC1_1 on Top Layer "HEATSINK_BUCK" (solid, pour order 6): 22.803,69 22.75,82 22.15,82.6 1,82.6 1,52.037 11.639,42.2 11.639,69
GND on Top Layer "GND_L01_P032" (solid, remove dead copper, pour order 32): 21.6,54.4 24.8,54.4 24.8,52.5 23.5,51.2 20.9,51.2 20.9,53.7
GND on Top Layer "GND_L01_P034" (solid, pour order 34): 23.105,55.505 23.105,53.6 21.6,53.6 21.3,53.9 22.905,55.505
NetCout1_1 on Top Layer "NETCOUT1_1_L01_P014" (solid, pour order 14): 32.05,75.95 22,86 10.8,86 10.8,88.2 12.1,89.5 12.1,89.7 12.9,89.7 13.9,88.7 35.3,88.7 35.3,77.7 33.55,75.95
GND on Top Layer "GND_L01_P016" (solid, pour order 16): 23.6,89.8 23.6,91.7 74.3,91.7 75,91.7 75,89.8
NetCout4_1 on Top Layer "NETCOUT4_1_L01_P018" (solid, pour order 18): 62.8,88.1 68.9,84 85.5,84 89.8,88.3
NetC6_2 on Top Layer "NETC6_2_L01_P020" (solid, pour order 20): 91.2,33.2 91.2,56.2 83.5,63.9 81.049,63.9 80.8,63.651 80.8,61.7 87.2,55.3 87.2,32.958
NetC6_2 on Top Layer "NETC6_2_L01_P026" (solid, pour order 26): 77.8,67.3 78.5,66.6 79.2,66.6 79.2,66 78.5,66 78.1,65.7 68.25,65.75 65.7,65.75 65.6,65.85 65.6,66.7 66.6,67.7 76.4,67.7 76.8,67.3
GND on Bottom Layer "GND_L02_P030" (solid, remove dead copper, pour order 30): 5,99 ccw(c5,95) 1,95 1,5 ccw(c5,5) 5,1 95,1 ccw(c95,5) 99,5 99,95 ccw(c95,95) 95,99

## Silkscreen, mask and mechanical layers (free items; w line width, h text height)
Top Overlay:
  lines w1: 50,13.1 50,41.1 ; 50,49 50,70
  text "Rmax: 900 Ohm" at 77.6,75.4 h1.52
Bottom Overlay:
  text "a" at 57.5,49 h15
  text "SMPS Demo Board / Revision 1A / Feb. 2018" at 100,24.1 h2
Outline:
  the board outline again, w0.254